# Altium PCB CAN Logger 3b HP3561 PCB - autoroute2.PcbDoc (part 3 of 3)
Units mil, origin at the board's own origin, x right, y up, seen from the top; angles counter-clockwise.
Board outline 2229 x 3254 mil, 4 copper layers (Component Side, Signal Layer 2, Signal Layer 1, Solder Side), stack 33.234 mil thick; 116 components, 130 nets, 579 pads, 364 vias.
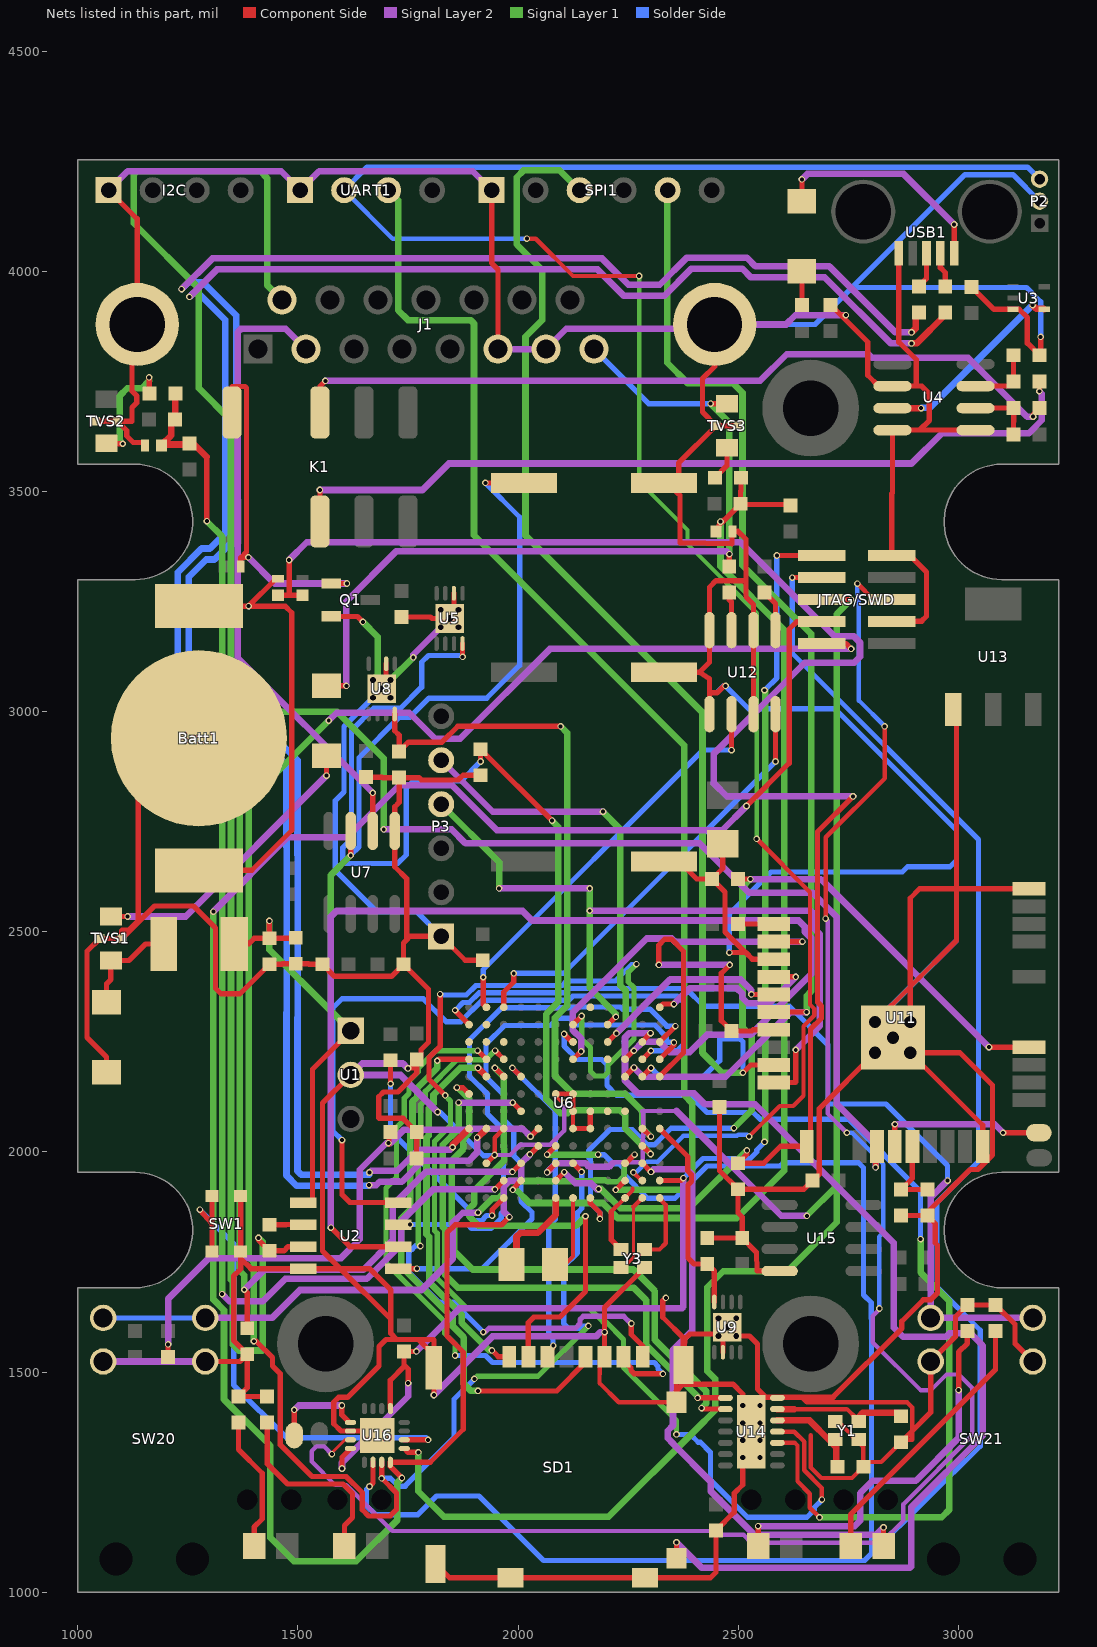
[diagram p4: the nets of this part, all layers, seen from the top]

## Via types
v1: diameter 15, hole 9, Component Side to Solder Side, 282 vias
v2: diameter 20, hole 10, Component Side to Solder Side, 66 vias
v3: diameter 20, hole 13, Component Side to Solder Side, 12 vias
v4: diameter 50, hole 28, Component Side to Solder Side, 4 vias

## Nets (pads, with @x,y where several pads share a name; then routed paths per layer and width w, separated by ;. In a path a pad name is that pad's centre, name@x,y a point inside that pad or via, vN(x,y) a via of type N, cw(c..) or ccw(c..) an arc to the next point about the centre after c; other vN are vias at no path point) (continued)
D20: U6.A3 U12.8 | length 988.2
  Component Side w12: U6.A3@1967.52,2328.7 1967.52,2363.52 1990.28,2386.28 v1(1990.28,2406) ; v1(2585,2887) U12.8@2585,2994.53
  Solder Side w12: v1(1990.28,2406) 2104,2406 v1(2585,2887)
D21: U6.A2 U12.6 | length 940.5
  Component Side w12: v1(1921,2396.96) 1921,2335.85 U6.A2@1928.15,2328.7 ; v1(2485,2913) U12.6@2485,2994.53
  Solder Side w12: v1(1921,2396.96) 1921,2414 2420,2913 v1(2485,2913)
D23: U6.A12 U11.13 | length 421.5
  Component Side w12: U6.A12@2321.85,2328.7 2329.15,2336 v1(2354,2336) ; U11.13@2581.04,2397.79 v1(2631,2397.79)
  Signal Layer 2 w15: v1(2354,2336) 2389.75,2371.75 2497.81,2371.75 2509.53,2360.04 2509.53,2350.19 2521.72,2338 2571.21,2338 v1(2631,2397.79)
D24: R17.1 U6.K4 U11.22 | length 4489.8
  Component Side w12: v1(1378,1687) 1385,1680 R17.1@1385,1599.53 ; v1(1987,1955) 1987.52,1955 U6.K4@2006.89,1974.37 ; v1(2812.57,1965) 2812.57,2009.64 U11.22@2815.84,2012.91
  Signal Layer 2 w15: v1(1378,1687) 1423,1732 1648.28,1732 1715,1798.72 1715,1878.72 1791.28,1955 v1(1987,1955) ; v1(1695,2733) 1849,2733 1881,2701 2413,2701 2525,2589 2669,2589 2724,2534 2724,2109.1 2812.57,2020.53 v1(2812.57,1965)
  Signal Layer 1 w15: v1(1378,1687) 1378,1720 1368,1730 1368,2981.5 1386.5,3000 1589,3000 1695,2894 v1(1695,2733)
D25: R27.1 U6.M8 U11.4 | length 2020.4
  Component Side w12: U6.M8@2164.37,1895.63 2164.37,1883.6 2186,1861.97 v1(2186,1848) ; R27.1@2499.53,2620 v1(2527.77,2620) ; v1(3070,2238.03) U11.4@3160.96,2238.03
  Signal Layer 2 w15: v1(2527.77,2620) 2688.03,2620 v1(3070,2238.03)
  Signal Layer 1 w15: v1(2490.25,2054) 2531,2094.75 2531,2262 2510,2283 2510,2602.23 v1(2527.77,2620)
  Solder Side w12: v1(2186,1848) 2186,1862 2164.5,1883.5 2164.5,1983.34 2160.5,1987.34 2160.5,2002.66 2208.94,2051.1 2259.27,2051.1 2294.2,2016.17 2309.52,2016.17 2347.35,2054 v1(2490.25,2054)
D26: U6.L10 UART1.3 | length 2833.1
  Component Side w12: v1(2222,1913.89) U6.L10@2243.11,1935
  Signal Layer 1 w15: UART1.3@1705,4185 1728,4162 1728,3912 1750,3890 1892,3890 1900,3882 1900,3401.1 2377.53,2923.57 2377.53,2129.47 2395.6,2111.4 2395.6,1932.09 2377.4,1913.89 v1(2222,1913.89)
D27: P2.3 U6.L11 UART1.2 | length 4891.5
  Component Side w10: v1(2020,4075) 2040,4075 2125,3990 v1(2275,3990) ; v1(2262,1953.68) 2262,1953.39 2280.39,1935 U6.L11@2282.48,1935 ; v1(2525,2035) 2594.53,2104.53 2625.14,2104.53 2648.5,2127.89 2648.5,2285.59 2673.34,2310.43 2673.34,2324.93 2663.32,2334.95 2663.32,2590.26 v1(2542.08,2711.5)
  Signal Layer 1 w10: v1(2275,3990) 2275,3523 2385,3413 2385,3381.25 2542.08,3224.17 v1(2542.08,2711.5)
  Solder Side w10: UART1.2@1605,4185 1715,4075 v1(2020,4075) ; v1(2262,1953.68) 2268.68,1953.68 2292.99,1977.99 2316.85,1977.99 2375.37,2036.5 2497.5,2036.5 2500,2039 2521,2039 v1(2525,2035)
  Solder Side w12: UART1.2@1605,4185 1657.32,4237.32 3157.68,4237.32 P2.3@3185,4210
D28: SW20.1 SW20.3 U6.K10 | length 1461.3
  Component Side w12: U6.K10@2242.3,1971.41 U6.K10@2243.11,1972.22 ; U6.K10@2243.11,1974.37 U6.K10@2243.11,1972.22 ; v1(2265,1994.11) U6.K10@2243.11,1972.22
  Signal Layer 2 w15: SW20.3@1289.5,1623 1441,1623 1504.5,1686.5 1780.5,1686.5 1852,1758 1852,1839.68 1874.32,1862 v1(1909,1862)
  Signal Layer 1 w12: 2203.74,1932.39 2227.55,1932.39 2241.5,1946.34 2241.5,1970.61 v1(2265,1994.11)
  Signal Layer 1 w15: v1(1909,1862) 1942,1895 1955.8,1895 1967.52,1906.72 1967.52,1921.8 1979.72,1934 2057.35,1934 2057.72,1933.63 2172.46,1933.63 2174.72,1935.89 2196.96,1935.89
  Solder Side w12: SW20.1@1057.5,1623 SW20.3@1289.5,1623
D29: U2.1 U6.D12 | length 1322.7
  Component Side w12: U2.1@1727.87,1735 v1(1770,1735) ; U6.D12@2321.85,2210.59 2354,2242.74 v1(2354,2249)
  Solder Side w12: v1(1770,1735) 1918.81,1735 2031.65,1847.84 2031.65,1863.16 2007,1887.81 2007,1975 1990,1992 1990,2050.8 1969.5,2071.3 1969.5,2128.5 1927.5,2170.5 1927.5,2245.23 1969.77,2287.5 2073.3,2287.5 2089.3,2303.5 2119.43,2303.5 2134.43,2288.5 2310.5,2288.5 2337.5,2261.5 2337.5,2250 2338.5,2249 v1(2354,2249)
D30: U2.4 U6.D11 | length 1628.5
  Component Side w12: v1(1600,2027) 1600,1903 1618,1885 U2.4@1727.87,1885 ; U6.D11@2282.48,2210.59 v1(2301.89,2230)
  Solder Side w12: v1(1600,2027) 1579,2048 1579,2327 1600,2348 1784.5,2348 1836.5,2296 1869.84,2296 1918.29,2344.46 2114.58,2344.46 2124.62,2354.5 2361.66,2354.5 2376.03,2340.13 2376.03,2244.87 2361.16,2230 v1(2301.89,2230)
D31: R33.1 U6.E12 U11.16 | length 850.9
  Component Side w12: v1(2320,2425) 2320,2470.16 2333.34,2483.5 2348.66,2483.5 2376.03,2456.13 2376.03,2225.4 U6.E12@2321.85,2171.22 ; v1(2481,2425) 2462,2406 2462,2298.15 R33.1@2485.15,2275 2531,2275 2533.79,2277.79 U11.16@2581.04,2277.79
  Signal Layer 2 w15: v1(2320,2425) v1(2481,2425)
D32: SPI1.3 U6.E11 U11.18 | length 2934.8
  Component Side w12: U6.E11@2282.48,2171.22 v1(2302.13,2190.87) ; v1(2511,2180) 2528.79,2197.79 U11.18@2581.04,2197.79
  Signal Layer 1 w15: SPI1.3@2140,4185 2095,4230 2012.5,4230 1997,4214.5 1997,4062 2055,4004 2055,3890 2017,3852 2017,3400.78 2419,2998.78 2419,2225 2464,2180 v1(2511,2180)
  Solder Side w12: v1(2302.13,2190.87) 2323,2170 2420.5,2170 2458,2207.5 2458,2256 2459,2257 2504.5,2257 2511,2250.5 v1(2511,2180)
D35: U6.A8
D36: U6.D7 U11.11 | length 780.9
  Component Side w12: U6.D7@2125,2210.59 2125.59,2210.59 v1(2143.49,2228.49) ; U11.11@2581.04,2477.79 2645.76,2477.79 v1(2645.82,2477.85)
  Signal Layer 2 w15: v1(2143.49,2228.49) 2143.49,2257.52 2124.69,2276.32 2124.69,2317.3 2292.39,2485 2349.28,2485 2356.43,2477.85 v1(2645.82,2477.85)
D37: U6.C7 U14.3 | length 2314.8
  Component Side w10: U14.3@2589.37,1339.1 2629.14,1339.1 2635,1333.24 2635,1251.67 2663,1223.67 2663,1192 v1(2685,1170)
  Component Side w12: v1@2104.77,2268 U6.C7@2123.91,2248.87 ; U6.C7@2123.91,2249.41 U6.C7@2123.91,2248.87 ; U6.C7@2125,2249.96 U6.C7@2123.91,2248.87
  Signal Layer 1 w15: v1(2685,1170) 2962.5,1170 2980,1187.5 2980,1661 2914.5,1726.5 v1(2914.5,1802)
  Solder Side w12: v1(2104.72,2268) 2104.72,2241.1 2135.83,2209.99 2190.17,2209.99 2202,2198.16 2202,2151 2224,2129 2390,2129 2429.5,2089.5 2534.5,2089.5 2549.5,2074.5 2750.45,2074.5 2914.5,1910.45 v1(2914.5,1802)
D38: U6.B7 U14.4 | length 3092.8
  Component Side w10: U14.4@2589.37,1364.69 2627.35,1364.69 2650,1342.04 2650,1276.91 2690.29,1236.62 v1(2690.29,1210)
  Component Side w12: v1(1823,2358.5) 1823,2239.95 1798,2214.95 1798,2165.19 v1(1834.69,2128.5) ; U6.B7@2125,2289.33 v1(2144.69,2309.02)
  Signal Layer 1 w12: v1(1834.69,2128.5) 1834.69,2127.69 1846.5,2115.87 1846.5,2060.22 1810.5,2024.22 1810.5,1821.2 1816.5,1815.2 1816.5,1712.27 1882.93,1645.84 2161.33,1645.84 2193.8,1613.36 2200.35,1613.36 2239.78,1573.94 2239.78,1510.22 2360,1390 v1(2360,1358.29) ; v1(2144.69,2309.02) 2144.69,2257.08 2164.5,2237.26 2164.5,2183.34 2175.34,2172.5 2195.97,2172.5 2204.5,2181.03 2204.5,2197.66 2263.5,2256.66 2263.5,2373.38 2250.54,2386.34 2250.54,2408.11 v1(2269.04,2426.61)
  Solder Side w12: v1(1823,2358.5) 1825,2356.5 1882.25,2356.5 1904.21,2378.46 2100.5,2378.46 2110.54,2388.5 2220.79,2388.5 2258.33,2426.04 2268.47,2426.04 v1(2269.04,2426.61) ; v1(2360,1358.29) 2391.71,1358.29 2409.5,1340.5 2414.67,1340.5 2437.5,1317.67 2437.5,1254.42 2521.92,1170 2656,1170 2672.75,1186.75 2672.75,1191.64 2690.29,1209.19 v1(2690.29,1210)
D39: D6.1 U6.K11 | length 1393.9
  Component Side w12: U6.K11@2282.48,1974.37 v1(2302,1954.85) ; D6.1@2830.4,1105 v1(2830.4,1147)
  Signal Layer 2 w15: v1(2302,1954.85) 2307.52,1960.37 2383.88,1960.37 2395.6,1948.65 2395.6,1593.78 2352,1550.18 2352,1378.57 2340,1366.57 2340,1350 2352,1338 2352,1337 2437.5,1251.5 2437.5,1229.81 2537.31,1130 2813.4,1130 v1(2830.4,1147)
D40: R13.1 U6.H12 U9.8 | length 469.6
  Component Side w12: U6.H12@2321.85,2053.11 2385.5,1989.46 2385.5,1956.63 2394.1,1948.03 2394.1,1932.71 2386,1924.61 2386,1759.47 2400,1745.47 R13.1@2430,1745.47 2445.94,1729.53 U9.8@2445.94,1659.17
D41: R12.1 U6.H11 U8.8 | length 1619.7
  Component Side w12: U8.8@1720,2995 1720,2957 1730,2947 R12.1@1730,2909.53 1751.47,2931 1827,2931 1863,2967 v1(2097,2967) ; U6.H11@2282.48,2053.11 U6.H11@2282.95,2053.58 ; U6.H11@2284.65,2055.28 U6.H11@2282.95,2053.58 ; v1(2301.86,2034.67) U6.H11@2282.95,2053.58
  Signal Layer 1 w15: v1(2097,2967) 2111.5,2952.5 2111.5,2332.4 2084,2304.9 2084,2172.88 2124.88,2132 2243.47,2132 2282.22,2093.25 2282.22,2054.31 v1(2301.86,2034.67)
D42: R11.1 U5.8 U6.J11 | length 2440.8
  Component Side w12: v1(1874,3125) 1874.06,3125.06 U5.8@1874.06,3155 ; v1(1915,2887) R11.1@1915,2915 v1(2077.33,2752.67) ; U6.J11@2282.48,2013.74 2283.19,2013.74 v1(2301.44,1995.49)
  Signal Layer 1 w15: v1(2077.33,2752.67) 2091.5,2738.5 2091.5,2340.68 2064,2313.18 2064,2120.26 2095.84,2088.42 2112.41,2088.42 2118.99,2095 2231.71,2095 2243.43,2083.28 2243.43,2053.5 v1(2301.44,1995.49)
  Solder Side w12: v1(1874,3125) 1871,3128 1796.5,3128 1781,3112.5 1781,3056 1733,3008 1672,3008 1621.75,2957.75 1621.75,2711.25 1601.5,2691 1601.5,2657 1603,2655.5 1726.5,2655.5 1746,2675 1746,2826.5 1762.5,2843 1871,2843 v1(1915,2887)
D43: U2.2 U6.D10 | length 2610
  Component Side w12: v1(1575,1828) 1618,1785 U2.2@1727.87,1785 ; U6.D10@2243.11,2210.59 2262.52,2230 v1(2263,2230)
  Signal Layer 2 w15: v1(1575,1828) 1575,2535 1587.5,2547.5 2010.5,2547.5 2032,2526 2637.5,2526 2651,2512.5 2651,2500.96 2665.82,2486.14 2665.82,2403.82 2528,2266 2429,2266 2390,2227 2344.65,2227 2321.65,2250 2283,2250 v1(2263,2230)
D44: U2.3 U6.C12 | length 1253.7
  Component Side w12: U2.3@1727.87,1835 v1(1755,1835) ; U6.C12@2321.85,2249.96 2357.53,2285.64 v1(2357.53,2285.87)
  Solder Side w12: v1(1755,1835) 1885.8,1835 1894.3,1826.5 1938.55,1826.5 1961.63,1849.57 1961.63,1859.82 1967.16,1865.35 1967.16,2049.59 1930.6,2086.16 1930.6,2131.37 1889.96,2172 1889.96,2255 1962.42,2327.46 2121.62,2327.46 2123.67,2329.5 2232.66,2329.5 2237.66,2324.5 2299.5,2324.5 2338.13,2285.87 v1(2357.53,2285.87)
D45: SD1.DT U6.C11 | length 2533.2
  Component Side w12: U6.C11@2282.48,2249.96 2282.48,2251.48 v1(2301,2270) ; SD1.DT@2359.65,1076.99 2360,1076.99 v1(2360,1113)
  Signal Layer 2 w15: v1(2301,2270) 2253,2270 2243,2260 2243,2162.5 2272.5,2133 2400,2133 2425,2108 2539,2108 2853.75,1793.25 2853.75,1601.25 2875,1580 2972,1580 2980,1588 3028,1588 3056,1560 3056,1355.5 2893,1192.5 2893,1058 2890,1055 2418,1055 v1(2360,1113)
D46: U6.D9
D47: P3.5 U6.C9 U11.14 | length 1405.7
  Component Side w12: U6.C9@2203.74,2249.96 v1(2223.43,2269.65) ; v1(2530,2358) 2580.83,2358 U11.14@2581.04,2357.79
  Signal Layer 2 w15: P3.5@1825.47,2890 1942.47,2773 v1(2193,2773) ; v1(2223.43,2269.65) 2345.53,2391.75 2506.09,2391.75 2530,2367.85 v1(2530,2358)
  Signal Layer 1 w15: v1(2193,2773) 2232.04,2733.96 2232.04,2378.67 2245,2365.71 2245,2291.22 v1(2223.43,2269.65)
D48: P3.4 U6.B9 U11.19 | length 1766.7
  Component Side w12: U6.B9@2203.74,2289.33 2221.41,2307 v1(2222.23,2307) ; U11.19@2581.04,2157.79 2630,2157.79 2631,2158.79 v1(2631,2232)
  Signal Layer 2 w15: v1(1957,2599) v1(2163,2599) ; v1(2163,2548) 2665,2548 2671,2542 2671,2509.24 2685.82,2494.42 2685.82,2286.82 v1(2631,2232)
  Signal Layer 1 w15: P3.4@1825.47,2790 1957,2658.47 v1(1957,2599) ; v1(2163,2599) v1(2163,2548) 2163,2373 2222.23,2313.77 v1(2222.23,2307)
D49: U6.G10
D50: U6.G9
D51: U6.C2
D52: U6.C3
D53: SW21.1 SW21.3 U6.B1 | length 2024.1
  Component Side w12: v1(1857,2322) 1857,2321.11 U6.B1@1888.78,2289.33
  Signal Layer 2 w15: v1(2975.84,1935) 2937.5,1896.66 SW21.1@2937.5,1623 SW21.3@3169.5,1623
  Solder Side w12: v1(1857,2322) 1857.81,2322 1875.31,2339.5 1889.3,2339.5 1911.25,2361.46 2107.54,2361.46 2117.58,2371.5 2381.5,2371.5 2422,2331 2616.36,2331 2704,2243.36 2704,2110 2705,2109 2836.16,2109 2975.84,1969.32 v1(2975.84,1935)
D54: U6.C1
D55: U6.B2
D56: U6.F1 U14.9 | length 1304.5
  Component Side w12: v1(1861,2146) 1874.63,2146 U6.F1@1888.78,2131.85 ; v1(2417,1418) 2419.13,1415.87 U14.9@2471.26,1415.87
  Signal Layer 1 w15: v1(1861,2146) 1863.28,2146 1889,2120.28 1889,2043.37 1876,2030.37 1876,2006.99 1849,1979.99 1849,1837.15 1855,1831.15 1855,1775 1897,1733 2262,1733 2311,1684 2311,1573 2428,1456 2428,1429 v1(2417,1418)
D57: U6.G4 U14.8 | length 1371.3
  Component Side w12: v1(1988,2112) U6.G4@2006.14,2093.86 ; v1(2408,1441.46) U14.8@2471.26,1441.46
  Signal Layer 2 w15: v1(1865,2112) v1(1988,2112)
  Signal Layer 1 w15: v1(1865,2112) 1865,2052.56 1829,2016.56 1829,1828.86 1835,1822.86 1835,1719.93 1862.93,1692 2262.5,1692 2291,1663.5 2291,1562.01 2408,1445.01 v1(2408,1441.46)
DAC0: C17.2 D9.2 R15.2 R24.1 U6.L3 | length 2964.6
  Component Side w12: R24.1@1220.45,3655 R24.1@1220.45,3663.93 ; v1(1293,3433) 1293,3579 ; v1(1947.52,1915) U6.L3@1967.52,1935
  Component Side w15: R24.1@1220.38,3664 1212.13,3655.75 1212.13,3628.07 1190.04,3605.98 D9.2@1190.04,3605 1192.31,3607.26 1251.24,3607.26 C17.2@1253.5,3609.53 1255.03,3608 1264,3608 1293,3579 ; R24.1@1220.45,3663.93 1220.95,3664.43 1220.95,3722.43 R15.2@1221.53,3723
  Signal Layer 2 w15: v1(1328,1677) 1344,1661 1420.5,1661 1471.5,1712 1656.57,1712 1735,1790.43 1735,1843.28 1806.72,1915 v1(1947.52,1915)
  Signal Layer 1 w15: v1(1293,3433) 1328,3398 v1(1328,1677)
DAC1: C24.2 D10.2 R25.2 R28.1 U6.L4 | length 2526.7
  Component Side w12: v1@1990.28,1918.39 U6.L4@2006.89,1935 ; D10.2@2449.53,3410 2456.92,3424 2476.92,3444 ; v1(2460,3432) 2464.92,3432 2476.92,3444 ; R25.2@2506.6,3531.85 2506.6,3502.15 2505.45,3501 R28.1@2505.45,3472.53 ; C24.2@2618.79,3469.05 2617.06,3470.79 2507.19,3470.79 R28.1@2505.45,3472.53 ; 2476.92,3444 R28.1@2505.45,3472.53
  Signal Layer 1 w15: v1(1988,1914) 1996,1914 2026,1884 2192.28,1884 2226.28,1850 2497,1850 2605,1958 2605,3186 2460,3331 v1(2460,3432)
EOSC16: U6.M11 Y3.1 | length 172.3
  Component Side w7: Y3.1@2242.3,1740 2261.93,1759.62 2261.93,1875.08 2262,1875.15
  Component Side w10: 2262,1875.15 U6.M11@2282.48,1895.63
EXTAL32: U6.M6 X1.2 | length 216.4
  Component Side w15: X1.2@1985.57,1744 1996.56,1754.98 1996.56,1807.9 2005.34,1816.68 2045.21,1816.68 2085.63,1857.1 U6.M6@2085.63,1895.63
GND: Batt1.2 C1.1 C2.2 C3.2 C4.2 C5.1 C6.1 C7.1 C8.1 C9.1 C10.2 C11.1 C12.1 C13.1 C14.1 C15.1 C16.1 C18.1 C19.1 C20.1 C22.1 C28.2 D9.1 D10.1 I2C.1 J1.6 J1.7 J1.16 J1.17 JTAG/SWD.3 JTAG/SWD.9 L5.1 P2.2 P3.1 Q1.2 R2.2 R3.2 R7.2 R8.2 R9.2 R11.2 R12.2 R13.2 R14.1 R17.2 R19.2 R23.2 R27.2 SD1.6 SD1.P1 SD1.P2 SD1.P3 SD1.P4 SD1.P5 SD1.SW SPI1.1 SW1.3 SW1.4 SW20.2 SW20.4 SW21.2 SW21.4 TVS1.3 TVS2.3 TVS3.3 U1.2 U2.8 U3.3 U4.2 U4.4 U4.5 U5.0 U5.2 U6.F6 U6.F7 U6.G7 U6.G8 U6.H3 U6.H7 U6.H8 U6.K2 U6.M10 U7.5 U8.0 U8.2 U9.0 U9.2 U11.9 U11.12 U11.28 U11.29 U12.2 U12.4 U12.5 U12.7 U13.1 U14. U14.7 U15.4 U16.2 U16.17 UART1.1 USB1.4 Y1.2 Y1.4 Y3.2 Y3.4 Z1.1 | length 27834.5
  Component Side w8: U6.F6@2085.63,2131.85 2080.69,2131.85 2100.54,2112 v1(2105.29,2112)
  Component Side w10: v1(1947.01,1993.23) 1947.01,2032.6 U6.H3@1967.52,2053.11 ; U6.H7@2125,2053.11 U6.G7@2125,2092.48 ; SD1.6@2196.66,1534.87 2185.91,1524.12 2185.91,1495.46 2185,1494.54 2185,1475 2228.68,1431.32 SD1.SW@2359.65,1431.32 2359.65,1457.11 2359.65,1500.02 SD1.P2@2375.6,1515.97 ; 2210.5,1863.02 2211.5,1864.02 U6.M10@2243.11,1895.63 2260.12,1912.64 2260.12,1916.99 ; U14.7@2589.37,1441.46 2645.71,1441.46 2655.84,1431.32 2883.84,1431.32 2895.75,1419.42 2895.75,1366.22 2895.75,1346.33 2875.86,1346.33 C14.1@2870,1340.47 2825.27,1295.75 2795.28,1295.75 C15.1@2784.53,1285 ; 2665,1356.02 2665,1283.13 2688.87,1259.25 2758.78,1259.25 C15.1@2784.53,1285 ; Y1.2@2734,1380.85 2784.53,1330.32 C15.1@2784.53,1285
  Component Side w12: TVS2.3@1040,3660 TVS2.3@1090,3660 ; Z1.1@1065,2181 1065,2216 1021,2260 1021,2456 TVS1.3@1050,2485 TVS1.3@1100,2485 ; I2C.1@1070,4185 1135,4120 J1.16@1135,3880 1123,3868 1123,3728.5 1123.16,3728.5 1134,3717.66 1134,3702.34 1123.16,3691.5 1123,3691.5 1123,3660 TVS2.3@1090,3660 ; D9.1@1152.64,3605 1152.64,3609.2 1149.78,3612.05 1125.78,3612.05 1110.97,3626.87 1110.97,3639.03 TVS2.3@1090,3660 ; Batt1.2@1275,2940 1137,2802 1137,2525 1116,2504 1101,2504 1100,2503 TVS1.3@1100,2485 ; SW20.4@1289.5,1524 1368.53,1524 R17.2@1385,1540.47 ; SW1.4@1369.96,1900 SW1.3@1369.96,1774.02 1369.96,1757.99 ; R3.2@1430,1444.53 R2.2@1365,1444.53 1385,1464.53 R17.2@1385,1540.47 ; Q1.2@1575.71,3216.69 1635,3216.69 v1(1647.5,3204.19) ; U1.2@1620,2175 1556,2111 1556,1775 1596,1735 ; C16.1@1655,2851.62 1691,2851.62 1692.15,2850.47 R12.2@1730,2850.47 ; U16.17@1680.47,1356.02 1654.84,1356.02 1645,1365.87 U16.2@1619.45,1365.87 1598,1365.87 1581.34,1382.53 1581.34,1431.66 1592.17,1442.5 1612.62,1442.5 1684,1513.88 1684,1558 1700,1574 1724.5,1574 ; U8.2@1700.31,3109.17 1700.31,3082.24 v3(1710.47,3072.09) ; R14.1@1735,3215.47 1801.14,3215.47 1804.52,3212.09 U5.0@1844.53,3212.09 ; v1(1750,2190) 1750.57,2190.57 1766.07,2190.57 1770,2194.5 ; C4.2@1769.53,1985 1769.53,2015 1770,2015.47 C20.1@1770,2045.47 1739,2076.47 1685,2076.47 1683.53,2077.95 1683.53,2125.53 1694.5,2136.5 1727,2136.5 1770,2179.5 1770,2194.5 ; SD1.P3@1813,1064 1844.3,1032.7 SD1.P4@1982.49,1032.7 SD1.P5@2288.79,1032.7 2437.5,1032.7 2450,1045.2 C8.1@2450,1140.47 2491,1181.47 2491,1224.37 2510.63,1244 U14.@2510.63,1305.63 ; U5.2@1854.37,3269.17 1854.37,3242.24 v3(1864.53,3232.09) ; R11.2@1915,2855.95 1874.95,2855.95 1864,2845 1780.47,2845 1775,2850.47 R12.2@1730,2850.47 ; C13.1@1920,2435.47 1880,2435.47 P3.1@1825.47,2490 1755,2490 1747,2482 ; U6.K2@1928.15,1974.37 v1(1947.01,1993.23) ; SPI1.1@1940,4185 1940,4019.49 1954.49,4005 J1.6@1954.49,3824.09 ; U6.F6@2085.63,2131.85 U6.F7@2125,2131.85 U6.G7@2125,2092.48 ; U6.H7@2125,2053.11 U6.H8@2164.37,2053.11 U6.G8@2164.37,2092.48 ; SD1.6@2196.66,1534.87 v1(2196.66,1590.89) 2196.66,1646.5 Y3.2@2287.16,1737 ; 2211.5,1864.02 2211.5,1800.85 Y3.4@2234.01,1778.34 ; C28.2@2332.05,2660 2366,2660 2406,2620 R27.2@2440.47,2620 ; C2.2@2332.05,3090 2412.5,3090 ; C3.2@2332.05,3520 C3.2@2340,3520 ; v1(2335.67,1668.6) 2328.85,1661.78 2328.85,1624.66 2378.55,1574.96 ; 2359.65,1457.11 2375,1472.46 2488.17,1472.46 2510.63,1450 U14.@2510.63,1423.74 ; 2368,3489.07 2368,3383.94 2485.93,3382 D10.1@2486.93,3410 2500,3410 2518,3392 2518,3298 ; 2368,3492 2365,3495 ; C3.2@2396,3520 C3.2@2365,3520 ; R13.2@2430,1804.53 2465.62,1804.53 C9.1@2509.37,1804.53 ; U12.5@2435,2994.53 2435,3042 ; J1.17@2446.81,3880 2446.81,3784.81 2419,3757 2419,3681 TVS3.3@2450,3650 ; 2452,3044 2435,3043 ; C7.1@2457.6,2102.32 2457.6,1957.4 C22.1@2499.52,1915.47 ; C12.1@2465,2700 2465,2644.53 R27.2@2440.47,2620 ; U9.2@2465.63,1545 2465.63,1571.93 v3(2455.47,1582.09) 2450.88,1586.68 2390.28,1586.68 2378.55,1574.96 ; v1(2471.56,3059) 2468.11,3059 2452.06,3042.95 2435,3042 ; v1(2480,2453) 2516.79,2453 ; v3(2495.47,1582.09) 2525.91,1582.09 2544,1564 2544,1461.5 2562.5,1443 2716,1443 2872,1599 2872,1615.48 2920.52,1664 2937.5,1664 2953,1679.5 2953,1788 2948,1793 2948,1837.47 C11.1@2930,1855.47 ; TVS3.3@2500,3650 TVS3.3@2450,3650 ; U14.@2510.63,1384.37 2510,1384.37 2529.68,1364.69 U14.@2530.31,1364.69 ; U12.7@2535,2994.53 U12.2@2535,3185.47 2535,3244 2518,3261 2518,3298 ; U15.4@2594.45,1729.53 2543,1729.53 2542,1771.89 C9.1@2509.37,1804.53 ; C6.1@2710,3924.53 2733.53,3901 ; v1(2745,3901) 2733.53,3901 ; v4(2811,2295.47) 2891,2375.47 ; JTAG/SWD.3@2849.06,3205 2850.06,3206 2917,3206 2927.99,3216.99 2927.99,3317.6 2890.59,3355 JTAG/SWD.9@2849.06,3355 2849.06,3496 2850.51,3497.46 U4.4@2850.51,3640 2912.5,3640 ; USB1.4@2865,4042 2865,3839.84 2905,3799.84 2905,3741 2904,3740 ; C5.1@2870,1855.47 C11.1@2930,1855.47 ; C14.1@2875.86,1346.33 2895.75,1366.22 2937.5,1407.97 SW21.2@2937.5,1524 2994,1580.5 2994,1625.69 R19.2@3020.84,1652.53 R23.2@3085,1652.53 3129,1608.53 3129,1564.5 SW21.4@3169.5,1524 ; v4(2891,2295.47) 2891,2375.47 ; U13.1@2988.9,3005 2988.9,2986 2996,2986 2996,2598.03 ; C19.1@3030.55,3965.43 3081.57,3914.41 U3.3@3124.57,3914.41 3138.59,3914.41 3157.03,3895.97 3157.03,3837.5 R7.2@3184.53,3810 3187.5,3812.97 v1(3187.5,3851.94) ; U4.5@3039.49,3640 2912.5,3640 ; U11.28@3055.84,2012.91 3055.84,2060.63 v4(2891,2225.47) ; U11.9@3160.96,2598.03 2996,2598.03 ; TVS1.3@1100,2485 1174,2559 1262.5,2559 1312.5,2509 1312.5,2372.1 1325,2359.6 1368.2,2359.6 C10.2@1435,2426.4 1464,2426.4 1465.15,2427.55 C1.1@1495,2427.55 1524,2427.55 1524.94,2426.61 R9.2@1555.47,2426.61 1583.08,2399 1712.61,2399 R8.2@1740,2426.39 ; 1369.96,1757.99 1369.96,1733.96 1354,1718 1354,1571.47 R17.2@1385,1540.47 ; 1369.96,1757.99 1392.95,1735 U2.8@1512.13,1735 1596,1735 ; 1596,1735 1711,1620 ; 1596,1735 1662.5,1735 1711,1686.5 1711,1620 ; 1711,1620 1711,1587.5 1724.5,1574 ; 1724.5,1574 1773.5,1574 ; R12.2@1730,2850.47 1730,2794 1720,2784 U7.5@1720,2729.49 1720,2648 1747,2621 1747,2482 ; R8.2@1740,2426.39 1796.75,2369.64 1796.75,2249.22 1779.75,2232.22 1779.75,2220.22 L5.1@1770,2210.47 1770,2194.5 ; R8.2@1740,2426.39 1740,2475 1747,2482 ; 1773.5,1574 1808.06,1574 1809.06,1573 SD1.P1@1809.06,1510.06 1809.06,1448.06 v1(1809,1448) 1809,1538.5 1773.5,1574 ; C3.2@2340,3520 C3.2@2365,3520 ; C3.2@2340,3520 2365,3495 ; 2365,3495 C3.2@2365,3520 ; C3.2@2365,3520 2365,3565 TVS3.3@2450,3650 ; 2378.55,1574.96 2375.6,1572 SD1.P2@2375.6,1515.97 2378.55,1574.96 ; 2412.5,3090 2435,3075 2435,3043 ; 2412.5,3090 2435,3112.5 U12.4@2435,3185.47 2435,3283 2450,3298 2518,3298 ; 2435,3042 2435,3043 ; R27.2@2440.47,2620 2470,2590.47 2470,2499.79 2516.79,2453 ; C22.1@2499.52,1915.47 2499.52,1862 2509.37,1852.16 C9.1@2509.37,1804.53 ; C22.1@2499.52,1915.47 2649.67,1915.47 C18.1@2669.19,1935 2684.5,1950.31 2684.5,2098.97 v4(2811,2225.47) v4(2891,2225.47) ; 2516.79,2453 2532,2437.79 U11.12@2581.04,2437.79 2532,2438.79 2517.79,2453 2516.79,2453 ; 2733.53,3901 2794.5,3840.03 2794.5,3764.52 2819.02,3740 U4.2@2850.51,3740 2904,3740 ; v4(2891,2225.47) 3004.03,2225.47 3078,2151.5 3078,1993 3045,1960 3027,1960 2930,1863 C11.1@2930,1855.47 ; 2891,2375.47 2891,2576.53 2912.5,2598.03 2996,2598.03 ; 2891,2375.47 2996,2480.47 2996,2598.03 ; 2904,3740 2917,3740 2934.5,3722.5 2934.5,3662 2912.5,3640
  Signal Layer 2 w10: v1(1947.01,1993.23) 1981.73,1993.23 2005,2016.5 2073.25,2016.5 2105.29,2048.55 v1(2105.29,2112)
  Signal Layer 2 w15: SW20.2@1057.5,1524 SW20.4@1289.5,1524 ; I2C.1@1070,4185 1113,4228 1462,4228 UART1.1@1505,4185 1548,4228 1897,4228 SPI1.1@1940,4185 ; v3(1670.47,3032.09) v3(1710.47,3032.09) ; v3(1670.47,3072.09) U8.0@1690.47,3072.09 ; U8.0@1690.47,3052.09 U8.0@1690.47,3072.09 ; v3(1710.47,3072.09) U8.0@1690.47,3072.09 ; v1(1750,2190) 1749.5,2190 1738.5,2201 1646,2201 U1.2@1620,2175 1733.24,2175 v1(1817.31,2090.93) ; v1(1762,3123.61) 1762,3129.56 v3(1824.53,3192.09) v3(1864.53,3192.09) ; v1(1809,1448) 1942,1581 2177.11,1581 2187,1590.89 v1(2196.66,1590.89) ; v3(1824.53,3232.09) 1825.44,3233 1863.61,3233 v3(1864.53,3232.09) 1864.53,3222 1854.44,3222 U5.0@1844.53,3212.09 ; J1.6@1954.49,3824.09 J1.7@2063.54,3824.09 2109.59,3870.14 2436.95,3870.14 J1.17@2446.81,3880 2608.98,3880 2629.98,3901 v1(2745,3901) ; v3(2455.47,1582.09) v3(2495.47,1582.09) ; v3(2455.47,1622.09) U9.0@2475.47,1622.09 ; U9.0@2475.47,1602.09 U9.0@2475.47,1622.09 ; v3(2495.47,1622.09) U9.0@2475.47,1622.09
  Signal Layer 1 w15: v1(1647.5,3204.19) 1681,3170.69 1681,3082.61 v3(1670.47,3072.09) ; v3(1710.47,3032.09) v3(1710.47,3072.09) v1(1762,3123.61) ; v3(1864.53,3192.09) v3(1864.53,3232.09) ; v3(2495.47,1582.09) v3(2495.47,1622.09)
  Solder Side w12: v3(1670.47,3032.09) 1604.75,2966.36 1604.75,2817.99 1584.5,2797.74 1584.5,2640.5 1680,2545 1770.47,2545 P3.1@1825.47,2490 ; v1(1817.31,2090.93) 1822.43,2090.93 1921.92,1991.45 v1@1945.23,1991.45 ; J1.17@2446.81,3880 2675,3880 2759,3964 ; 2452,3044 2467,3059 v1(2471.56,3059) 2523.56,3007 2720,3007 2996,2731 2996,2662.5 ; v1(2480,2453) 2480,2541 2575,2636 2873,2636 2885,2648 2981.5,2648 2996,2662.5 ; v4(2811,2295.47) 2996,2480.47 2996,2662.5 ; P2.2@3185,4160 3124.68,4220.32 3015.32,4220.32 2759,3964 ; v1(3187.5,3851.94) 3187.5,3931.66 3155.16,3964 2759,3964
J1708+: K1.2 R5.2 | length 1794.3
  Component Side w12: K1.2@1550,3680 1550,3739.5 v1(1562.5,3752) ; v1(3170,3670.5) 3170,3675 R5.2@3185,3690
  Signal Layer 2 w15: v1(1562.5,3752) 2550,3752 2610.5,3812.5 2796.31,3812.5 2804.72,3804.09 3022.91,3804.09 3156.5,3670.5 v1(3170,3670.5)
J1708-: K1.5 R6.2 | length 1867.3
  Component Side w12: K1.5@1550,3432.36 v1(1550,3504) ; v1(3184.46,3728.25) v1(3184.46,3728.25) R6.2@3184.53,3750
  Signal Layer 2 w15: v1(1550,3504) 1783,3504 1843,3564 2894,3564 2962.5,3632.5 3160.28,3632.5 3190,3662.22 3190,3722.71 v1(3184.46,3728.25)
LIN: J1.2 U7.6 | length 1436.8
  Component Side w12: U7.6@1670,2729.49 v1(1670,2816)
  Signal Layer 2 w15: J1.2@1518.27,3824.09 1472.5,3869.86 1370.77,3869.86 1363.44,3862.54 1363.44,3122.56 v1(1670,2816)
MOSI1: SPI1.5 U6.E10 U11.15 | length 2632.9
  Component Side w12: U6.E10@2243.11,2171.22 2263.39,2191.5 v1(2263.5,2191.5) ; U11.15@2581.04,2317.79 2655.73,2317.79 v1(2655.84,2317.68)
  Signal Layer 2 w15: v1(2263.5,2191.5) 2284.13,2170.87 2471.87,2170.87 2618.68,2317.68 v1(2655.84,2317.68)
  Signal Layer 1 w15: SPI1.5@2340,4185 2339,4184 2339,3793 2385,3747 2488,3747 2510,3725 2510,3333 2665.82,3177.18 2665.82,2364.82 2655.84,2354.84 v1(2655.84,2317.68)
NetBatt1_1: Batt1.1 D7.1 | length 1052.9
  Component Side w12: Batt1.1@1275,2640 1395,2640 1486,2731 1486,3225 1471,3240 v1(1388,3240) ; Batt1.1@1275,3240 v1(1388,3240) ; D7.1@1455,3302.4 1450.27,3302.4 1387.98,3240.11 v1(1388,3240)
NetC5_2: C5.2 C11.2 U11.24 | length 169.1
  Component Side w12: U11.24@2895.84,2012.91 2895.84,1940.37 C5.2@2870,1914.53 C11.2@2930,1914.53
NetC14_2: C14.2 U14.6 Y1.1 | length 315.4
  Component Side w7: Y1.1@2775.12,1399.63 Y1.1@2769.25,1393.75 ; Y1.1@2769.25,1393.75 2765.77,1390.28 2772.72,1390.28 Y1.1@2769.25,1393.75
  Component Side w10: 2627.35,1415.87 2747.13,1415.87 Y1.1@2769.25,1393.75
  Component Side w15: U14.6@2589.37,1415.87 2627.35,1415.87 ; Y1.1@2775.12,1399.63 2782.76,1407.26 2862.26,1407.26 C14.2@2870,1399.53
NetC15_2: C15.2 U14.5 Y1.3 | length 204.3
  Component Side w15: U14.5@2589.37,1390.28 2662.24,1390.28 2708.39,1344.13 2713.52,1339 2722.54,1329.98 2722.54,1287.94 C15.2@2725.47,1285
NetC23_2: C23.2 U6.M3 | length 539.8
  Component Side w12: v1(1710.47,2155) C23.2@1710.47,2208.27 ; v1(1941.39,1855.5) 1941.39,1869.5 U6.M3@1967.52,1895.63
  Solder Side w12: v1(1710.47,2155) 1710.47,2047.37 1890.5,1867.34 1890.5,1854.34 1901.34,1843.5 1916.66,1843.5 1928.66,1855.5 v1(1941.39,1855.5)
NetD1_2: D1.2 R2.1 | length 310.5
  Component Side w12: R2.1@1365,1385.47 1365,1324 1419,1270 1419,1166 1400.6,1147.6 D1.2@1400.6,1105
NetD2_2: D2.2 R3.1 | length 442.3
  Component Side w12: R3.1@1430,1385.47 1430,1292 1476.5,1245.5 1602.58,1245.5 1624,1224.08 1624,1170 1605.6,1151.6 D2.2@1605.6,1105
NetD3_2: D3.2 TVS1.1 | length 667.5
  Component Side w12: TVS1.1@1075,2535 v1(1113,2535) ; v1(1565,2855) D3.2@1565,2900
  Signal Layer 2 w15: v1(1113,2535) 1245,2535 v1(1565,2855)
NetD4_2: D4.2 R19.1 | length 871.5
  Component Side w12: D4.2@2545.6,1105 v1(2545.6,1150) ; v1(3001,1459) 3001,1545.32 3020.84,1565.16 R19.1@3020.84,1593.47
  Signal Layer 2 w15: v1(2545.6,1150) 2765,1150 2777.5,1162.5 2777.5,1225 2805.5,1253 2904,1253 3001,1350 v1(3001,1459)
NetD5_1: D5.1 USB1.1 | length 513.3
  Component Side w12: D5.1@2645,4160 v1(2645,4209.5) ; USB1.1@2990.98,4042 v1(2990.98,4107)
  Signal Layer 2 w15: v1(2645,4209.5) 2657.5,4222 2875.98,4222 v1(2990.98,4107)
NetD5_2: D5.2 L6.1 | length 76.5
  Component Side w12: L6.1@2645,3924.53 D5.2@2645,4001
NetD6_2: D6.2 R23.1 | length 624.9
  Component Side w12: D6.2@2755.6,1105 2755.6,1176 3085,1505.4 R23.1@3085,1593.47
NetD11_1: D11.1 K1.8 Q1.3 | length 805.4
  Component Side w12: K1.8@1350,3680 1350,3739.06 1379.5,3739.06 1383,3735.56 1383,3363 1370,3350 ; D11.1@1370,3330 1370,3350 ; v1(1387.5,3351) 1370,3350 ; Q1.3@1575.71,3291.5 v1(1611,3291.5)
  Signal Layer 2 w15: v1(1387.5,3351) 1447,3291.5 v1(1611,3291.5)
NetJ2_2: J2.2 U11.23 | length 385.2
  Component Side w12: U11.23@2855.84,2012.91 2855.84,2062.84 v1(2856,2063) ; v1(3102.3,2043.7) J2.2@3183.03,2043.7
  Signal Layer 2 w15: v1(2856,2063) 3083,2063 v1(3102.3,2043.7)
NetJ3_1: J3.1 U16.1 | length 218.4
  Component Side w12: J3.1@1491.65,1355.98 v1(1491.65,1414) ; v1(1599.84,1424) 1599.84,1402.71 1617,1385.55 U16.1@1619.45,1385.55
  Signal Layer 2 w15: v1(1491.65,1414) 1501.65,1424 v1(1599.84,1424)
NetJTAG/SWD_5: JTAG/SWD.5 U16.3 | length 4213.3
  Component Side w7: v1(1577,1313.5) 1578.53,1315.03 1578.53,1317.63 1607.09,1346.18 U16.3@1619.45,1346.18
  Component Side w10: v1(2699,2530) 2699,2714.74 2833,2848.74 v1(2833,2967) ; v1(2771,3291) 2771.52,3291 2807.52,3255 JTAG/SWD.5@2849.06,3255
  Signal Layer 2 w10: v1(1577,1313.5) 1559.7,1330.8 1541.45,1330.8 1531.2,1320.55 1531.2,1296.77 1584.47,1243.5 1609.83,1243.5 1714.33,1139 2446.47,1139 2455.47,1130 2512.57,1130 2530.07,1112.5 2825,1112.5 2875.5,1163 2875.5,1199.75 3032.14,1356.39 3032.14,1463.7 3001.3,1494.54 2973.54,1494.54 2938,1459 2914.5,1459 2805.5,1568 2805.5,1626.6 2820.85,1641.96 v1(2820.85,1644.5) ; v1(2699,2530) 2703.32,2525.68 2703.32,2087.38 v1(2747,2043.7)
  Solder Side w10: v1(2747,2043.7) 2758.62,2043.7 2830.07,1972.25 2830.07,1816.94 2820.85,1807.73 v1(2820.85,1644.5) ; v1(2771,3291) 2771,3265.75 2774.5,3262.25 2774.5,3025.5 v1(2833,2967)
NetPTC1_1: PTC1.1 TVS1.2 Z1.2 | length 234.7
  Component Side w12: Z1.2@1065,2340 1065,2382 1075,2392 TVS1.2@1075,2435 1116,2435 1153.5,2472.5 PTC1.1@1195,2472.5
NetR4_2: R4.2 R5.1 U4.6 | length 146.7
  Component Side w12: U4.6@3039.49,3690 R5.1@3125.95,3690 3125.95,3659.47 3125.47,3659 R4.2@3125.47,3630
NetR6_1: R6.1 R7.1 U4.7 | length 150.1
  Component Side w12: U4.7@3039.49,3740 3115.47,3740 R6.1@3125.47,3750 R7.1@3125.47,3810
NetR15_1: R15.1 TVS2.2 | length 267.1
  Component Side w12: TVS2.2@1065,3610 1066,3609 v1(1102,3609) ; v1(1161.93,3760) 1161.93,3723.55 R15.1@1162.47,3723
  Signal Layer 1 w15: v1(1102,3609) 1095.5,3615.5 1095.5,3718.28 1112.36,3735.14 1145.14,3735.14 1162,3752
NetR16_1: R16.1 U11.10 | length 81.5
  Component Side w12: R16.1@2499.53,2517.79 U11.10@2581.04,2517.79
NetR18_2: R18.2 U12.1 | length 95.9
  Component Side w12: R18.2@2560,3270.97 2585,3245.97 U12.1@2585,3185.47
NetR20_2: R20.2 U12.3 | length 87.6
  Component Side w12: R20.2@2480,3270.97 2480,3254.81 2485,3249.81 U12.3@2485,3185.47
NetR21_1: R21.1 U2.6 | length 77.3
  Component Side w12: R21.1@1435,1834.53 1473,1834.53 1473.47,1835 U2.6@1512.13,1835
NetR25_1: R25.1 TVS3.2 | length 79.5
  Component Side w12: R25.1@2447.55,3531.85 2475,3559.3 TVS3.2@2475,3600
NetR29_2: R29.2 USB1.2 | length 80
  Component Side w12: USB1.2@2959.49,4042 2959.49,4009.06 2970.55,3998 R29.2@2970.55,3966.58
NetR30_2: R30.2 USB1.3 | length 82.6
  Component Side w12: R30.2@2910.55,3966.58 2927.99,3984.02 USB1.3@2927.99,4042
NetSD1_1: SD1.1 U6.E2 | length 852.2
  Component Side w12: v1(1940.5,1549.5) 1955,1535 1980.13,1535 SD1.1@1980.13,1534.87
  Component Side w15: v1(1909,2191) 1928.15,2171.85 U6.E2@1928.15,2171.22
  Signal Layer 1 w15: v1(1909,2191) 1868.9,2191 1808,2130.1 1808,2109.91 1797.31,2099.22 1797.31,2037.19 1792,2031.88 1792,1813.54 1798,1807.54 1798,1704.6 1872,1630.6 1872,1611.6 1934.1,1549.5 v1(1940.5,1549.5)
NetSD1_2: SD1.2 U6.E3 | length 1097.4
  Component Side w12: v1(1947.52,2191) 1947.74,2191 U6.E3@1967.52,2171.22 ; SD1.2@2023.43,1534.87 2023.43,1612.5 2035.93,1625 2095.5,1625 2153.35,1682.85 v1(2153.35,1854)
  Signal Layer 1 w15: v1(1947.52,2191) 1968,2170.52 1968,2006.97 1968.66,2006.31 1968.66,1980.66 1901,1913 1901,1883.28 1889,1871.28 1889,1853.72 1910.56,1832.16 2131.51,1832.16 v1(2153.35,1854)
NetSD1_3: SD1.3 U6.E4 | length 740.4
  Component Side w12: v1(1987,2191.11) U6.E4@2006.89,2171.22 ; SD1.3@2066.74,1534.87 2066.74,1543.53 2079.43,1556.21 2079.43,1559.43 v1(2080,1560)
  Solder Side w12: v1(1987,2191.11) 2084.5,2093.61 2084.5,1846.96 2070,1832.46 2070,1585.81 2079.43,1576.39 2079.43,1560.57 v1(2080,1560)
NetSD1_5: SD1.5 U6.D1 | length 1222.8
  Component Side w12: v1(1816.5,2207.28) 1817.31,2207.28 1820.62,2210.59 U6.D1@1888.78,2210.59 ; v1(1909,1457.11) 2088.01,1457.11 2153.35,1522.46 SD1.5@2153.35,1534.87
  Signal Layer 1 w15: v1(1816.5,2207.28) 1816.5,2190.92 1771,2145.42 1771,2125.23 1760.31,2114.54 1760.31,2052.52 1755,2047.21 1755,1869.36 1735,1849.36 1735,1739.32 1852,1622.32 1852,1603.32 1877,1578.32 1877,1473.29 1893.17,1457.11 v1(1909,1457.11)
NetSD1_7: SD1.7 U6.D2 | length 1534.1
  Component Side w12: v1(1908.46,2230.28) U6.D2@1928.15,2210.59 ; SD1.7@2239.97,1534.87 2239.97,1526.2 2256.53,1509.64 2256.53,1503.69 2264.34,1495.88 v1(2328.85,1495.88)
  Signal Layer 1 w12: v1(1857,1537.72) 1857,1564.44 1833.5,1587.94 1833.5,1614.66 1700,1748.16 1700,1918.16 1723.91,1942.07 1723.91,2055.54 1741.81,2073.44 1741.81,2122.21 1752.5,2132.89 1752.5,2161.26 1773.53,2182.28 1773.53,2190.47 1813.33,2230.28 v1(1908.46,2230.28)
  Solder Side w12: v1(1857,1537.72) 1926.12,1537.72 1942.34,1521.5 2309.75,1521.5 2318.24,1513.01 2318.24,1507.31 2328.85,1496.69 v1(2328.85,1495.88)
NetSD1_8: SD1.8 U6.D3 | length 1337.2
  Component Side w12: v1(1947.83,2230.28) U6.D3@1967.52,2210.59 ; v1(2257.29,1610.34) 2257.29,1585.26 2283.28,1559.28 SD1.8@2283.28,1534.87
  Signal Layer 2 w12: v1(1921,1590.89) 1921.57,1591.46 1926.3,1591.46 1934.34,1599.5 2130.16,1599.5 2141,1610.34 2141,1619.22 2148.32,1626.54 2180.56,1626.6 2240.21,1626.6 2256.48,1610.34 v1(2257.29,1610.34)
  Signal Layer 1 w12: v1(1778,1786.43) 1773.5,1790.93 1773.5,2039.55 1778.81,2044.86 1778.81,2106.88 1789.5,2117.57 1789.5,2137.76 1861.24,2209.5 1927.06,2209.5 v1(1947.83,2230.28)
  Solder Side w12: 1767.47,1787.01 1759.46,1779 1758.53,1779 1751.5,1771.97 1751.5,1727.34 1819.44,1659.4 1852.49,1659.4 v1(1921,1590.89) ; 1767.48,1787 1777.43,1787 v1(1778,1786.43)
NetU3_4: U3.4 U4.3 | length 445.8
  Component Side w15: U4.3@2850.51,3690 v1(2916,3690) ; v1(3169,3924) 3177.09,3915.91 3193.93,3915.91 U3.4@3195.43,3914.41
  Solder Side w15: v1(2916,3690) 2917,3691 2936,3691 v1(3169,3924)
OSC16: U6.M12 Y3.3 | length 163.2
  Component Side w10: Y3.3@2287.16,1778.34 2321.49,1778.34 2335.67,1792.52 2335.67,1879.72 2321.85,1893.54 U6.M12@2321.85,1895.63
Program: SW1.1 SW1.2 U16.10 | length 1146.6
  Component Side w12: v1(1277,1869) 1305,1837 ; SW1.1@1305,1774.02 1305,1837 ; SW1.2@1305,1900 1305,1837 ; U16.10@1741.5,1346.18 v1(1796,1346.18)
  Solder Side w12: v1(1277,1869) 1354,1792 1354,1471 1474,1351 1791.18,1351 v1(1796,1346.18)
PTA0: JTAG/SWD.4 U6.J5 U16.8 | length 4917.8
  Component Side w12: v1(1736,1259.25) 1710,1285.25 U16.8@1710,1295 1800.5,1295 1875.5,1370 1875.5,1545.38 1838.76,1582.11 1838.76,1816.68 1856.61,1834.53 1962.5,1834.53 v1(1980.13,1852.16) ; v1(2027,1994.48) U6.J5@2046.26,2013.74 ; v1(2519,2786) 2616,2883 2616,3187.5 2633.5,3205 JTAG/SWD.4@2690,3205
  Signal Layer 2 w15: v1(1308,2546) 1477,2715 1612,2715 1730,2833 1850,2833 1952,2731 2464,2731 v1(2519,2786) ; v1(1980.13,1852.16) 1968,1864.28 1968,1922.28 1980.72,1935 2006,1935 2007,1936 2007,1974.48 v1(2027,1994.48)
  Signal Layer 1 w15: v1(1308,2546) 1308,1664.61 1332,1640.61 1332,1438 1437,1333 1437,1124 1491,1070 1632,1070 1726,1164 1726,1249.25 v1(1736,1259.25)
PTA1: JTAG/SWD.8 U6.J6 U16.6 | length 5705.6
  Component Side w12: v1(1662.5,1240.03) 1662.5,1240.24 1670.63,1248.37 U16.6@1670.63,1295 ; v1(2066,1994.11) U6.J6@2085.63,2013.74 ; v1(2623,3305) JTAG/SWD.8@2690,3305
  Signal Layer 1 w15: v1(2066,1994.11) 2181.89,1994.11 v1(2182,1994)
  Solder Side w12: v1@1662.5,1240.13 1656,1233.63 1656,1195.92 1675.92,1176 1772.46,1176 1814.96,1218.5 1911.5,1218.5 2058,1072 2787.5,1072 2803.09,1087.41 3050,1331.5 3050,1595 2952,1693 2952,1885 3046,1979 3046,2710 2623,3133 v1(2623,3305) ; v1(2182,1994) 2195.52,1994 2217.02,1972.5 2230.66,1972.5 2241.5,1961.66 2241.5,1948.02 2294.52,1895 2356.39,1895 2429.39,1968 2595.08,1968 2602.58,1975.5 2773.66,1975.5 2785,1964.16 2785,1675.19 2802.35,1657.84 2802.35,1621.81 2803,1621.16 2803,1087.5
PTA2: JTAG/SWD.6 U6.K6 U16.9 | length 4012.7
  Component Side w12: U16.9@1741.5,1326.5 1750.39,1317.6 v1(1773.5,1317.6) ; v1(2066,1953.63) 2066,1954.74 U6.K6@2085.63,1974.37 ; JTAG/SWD.6@2690,3255 v1(2757,3255)
  Signal Layer 2 w10: 2215.84,1976.35 2216.09,1976.61 2279.94,1976.61 2283.33,1980 ; 2283.6,1971.72 2284.88,2090.03 2282.48,2092.48 2360,2093
  Signal Layer 2 w15: v1(2066,1953.63) 2087.05,1974.68 2152.97,1974.68 2161.54,1966.11 2206.57,1966.11 2215.14,1974.68 ; 2360,2093 2598,1855 v1(2656,1855)
  Signal Layer 1 w15: v1(1773.5,1317.6) 1773.5,1229.22 1831.13,1171.59 2206.3,1171.59 2402,1367.28 2448,1413.28 2448,1484.5 2430,1502.5 2430,1692.68 2466.32,1729 2612.5,1729 2724,1840.5 2724,1923 ; v1(2656,1855) 2724,1923 ; v1(2757,3255) 2724,3222 2724,1923
PTA3: JTAG/SWD.2 U6.K7 U16.7 | length 4734.6
  Component Side w12: v1(1400,1570) 1405,1570 1442,1533 1442,1513.88 1460,1495.88 1460,1334.39 1531.89,1262.5 1609.62,1262.5 1646,1226.12 1646,1187.5 1660.5,1173 1709.5,1173 1724,1187.5 1724,1225 v1(1690.31,1258.69) ; v1@1690.31,1264.5 U16.7@1690.31,1295 ; U6.K7@2125,1974.37 v1(2144.69,1954.68) ; JTAG/SWD.2@2690,3155 2745,3155 v1(2757,3143)
  Signal Layer 2 w15: v1(1570,2980) 1588,2998 1753,2998 1812,2939 1868.5,2939 2072.5,3143 v1(2757,3143)
  Signal Layer 1 w12: v1(1901,1484.5) 1907,1490.5 2045.5,1490.5 v1(2160,1605)
  Signal Layer 1 w15: v1(1400,1570) 1400,1750 1388,1762 1388,2798 v1(1570,2980)
  Solder Side w12: v1(1690.31,1258.69) 1710.4,1258.69 1728.34,1240.75 1743.66,1240.75 1854.71,1351.8 1854.71,1438.21 v1(1901,1484.5) ; v1(2144.69,1954.68) 2144.69,1871.49 2134.85,1861.66 2134.85,1770.81 2104,1739.96 2104,1610.34 2114.84,1599.5 2144.5,1599.5 2149.43,1604.43 2159.43,1604.43 v1(2160,1605)
RAW: D3.1 J1.8 R20.1 TVS3.1 | length 1898.4
  Component Side w12: D3.1@1565,3059 v1(1610,3059) ; v1(2437.5,3700) TVS3.1@2475,3700 ; R20.1@2480,3330.03 v1(2480,3358.27)
  Signal Layer 2 w15: v1(1610,3059) 1610,3251 1724,3365 2473.27,3365 v1(2480,3358.27)
  Signal Layer 1 w15: v1(2437.5,3700) 2480,3657.5 v1(2480,3358.27)
  Solder Side w12: J1.8@2172.6,3824.09 2296.69,3700 v1(2437.5,3700)
RESET_B: JTAG/SWD.10 R34.2 U6.L12 U16.4 U16.13 | length 3191.7
  Component Side w12: v1(1600,1281) 1600,1306.5 1620,1326.5 U16.4@1619.45,1326.5 ; U16.13@1710,1417.05 1710,1481.29 1741.21,1512.5 1741.21,1515.95 ; v1(1750.57,1475) 1750.57,1506.58 1741.21,1515.95 ; v1(1768.95,1546.95) R34.2@1741.21,1546.95 1741.21,1515.95 ; U6.L12@2321.85,1935 2370.23,1935 v1(2375.6,1940.37) ; v1(2588,3355) JTAG/SWD.10@2690,3355
  Signal Layer 2 w15: v1(1600,1281) 1600,1294.51 1750.57,1445.08 v1(1750.57,1475) ; v1(1768.95,1546.95) 1866.5,1644.5 2373,1645.5 2375.6,1648.1 v1(2375.6,1940.37)
  Signal Layer 1 w15: v1(2560,2023) 2562.08,2025.08 2562.08,3046.92 v1(2560,3049)
  Solder Side w12: v1(2375.6,1940.37) 2420.23,1985 2527.66,1985 2542.46,1999.79 2542.46,2004.64 2560,2022.19 v1(2560,2023) ; v1(2560,3049) 2588,3077 v1(2588,3355)
"Safe 12V": C1.2 C3.1 C10.1 PTC1.2 U1.1 U2.5 U7.7 | length 2602.3
  Component Side w12: PTC1.2@1355,2472.5 1388,2472.5 1400.95,2485.45 C10.1@1435,2485.45 ; v1(1435,2525) C10.1@1435,2485.45 ; C1.2@1495,2486.6 1493.85,2485.45 C10.1@1435,2485.45 ; U2.5@1512.13,1885 1533,1885 1533,2188 U1.1@1620,2275 ; v1(1620,2674) U7.7@1620,2729.49 ; v1(1926,3520) C3.1@2013.15,3520
  Signal Layer 1 w15: v1(1435,2525) 1435,2460 1575,2320 ; U1.1@1620,2275 1575,2320 ; v1(1620,2674) 1575,2629 1575,2320
  Solder Side w12: v1(1620,2674) 1638.75,2692.75 1638.75,2895.6 1730.93,2987.78 1754.78,2987.78 1798,3031 1929,3031 2004,3106 2004,3442 v1(1926,3520)
SWCAN: J1.9 R21.2 U2.7 | length 3807.6
  Component Side w12: v1(1410.51,1804.99) 1410.51,1799.96 R21.2@1435,1775.47 1468,1775.47 1477.53,1785 U2.7@1512.13,1785
  Signal Layer 1 w15: v1(1410.51,1804.99) 1420,1795.5 1420,1550.07 1419,1549.07 1365.43,1549.07 1352,1562.5 1352,1706 1348,1710 1348,3662 1275,3735 1275,3962 1127,4110 1127,4220 1135,4228 1414.5,4228 1430,4212.5 1430,3969.65 J1.9@1463.74,3935.91
"USB D_N": R29.1 U6.H2 | length 4647.1
  Component Side w15: v1(1906.93,2032.6) 1908.37,2032.6 1928.15,2052.37 U6.H2@1928.15,2053.11 ; v1(2894,3837) 2905.57,3837 2970.55,3901.98 R29.1@2970.55,3907.53
  Signal Layer 2 w15: v1(1253.5,3942.5) 1316,4005 2180.46,4005 2240.46,3945 2332.22,3945 2394.21,4006.99 2509.37,4006.99 2529.37,3986.99 2697.01,3986.99 2847,3837 v1(2894,3837) ; v1(1661.79,1924.61) 1677.8,1924.61 1685.6,1932.4 1712.12,1932.4 1712.72,1933 1729.28,1933 1729.88,1932.4 1736.12,1932.4 1783.72,1980 1888.4,1980 1906.93,1998.53 v1(1906.93,2032.6)
  Solder Side w15: v1(1253.5,3942.5) 1261.86,3950.86 1274.29,3950.86 1335,3890.14 1335,3406 1299.91,3370.91 1281.27,3370.91 1227,3316.64 1227,3126.64 1474,2879.64 1474,2693.28 1474.5,2692.78 1474.5,2316.37 1474,2315.87 1474,1946.45 1497.43,1923.02 1660.2,1923.02 v1(1661.79,1924.61)
"USB D_P": R30.1 U6.H1 | length 4566.1
  Component Side w15: v1(1851.5,2010.77) 1851.5,2015.83 U6.H1@1888.78,2053.11 ; v1(2894,3862) 2902.79,3870.79 2904,3870.79 2904,3900.98 R30.1@2910.55,3907.53
  Signal Layer 2 w15: v1(1235.82,3960.18) 1305.64,4030 2190.82,4030 2250.82,3970 2321.87,3970 2383.86,4031.99 2519.73,4031.99 2539.73,4011.99 2707.37,4011.99 2857.36,3862 v1(2894,3862) ; v1(1662.5,1953.39) 1666.51,1957.4 1725.76,1957.4 1773.36,2005 1845.73,2005 v1(1851.5,2010.77)
  Solder Side w15: v1(1235.82,3960.18) 1251.5,3975.86 1284.64,3975.86 1360,3900.5 1360,3395.64 1310.26,3345.91 1291.62,3345.91 1252,3306.28 1252,3137 1499,2890 1499,2675.53 ; 1499.5,2680.03 1499.5,2306.01 1499,2305.51 1499,1956.81 1507.15,1948.65 v1@1661.82,1948.65
VBat: C22.2 D7.2 D8.2 U6.L6 U11.20 | length 3980.8
  Component Side w12: D7.2@1455,3265 1480,3265 ; v1(1480,3345) 1480,3265 ; D8.2@1510,3265 1480,3265 ; U6.L6@2085.63,1935 2086,1935 v1(2105,1954) ; v1(2520,2003.5) 2520,1995 C22.2@2499.52,1974.53 2558,1974.53 2596.39,2012.91 U11.20@2655.84,2012.91 2664.5,2021.57 2664.5,2278.96 2689.34,2303.81 2689.34,2331.56 2680.5,2340.4 2680.5,2727.5 v1(2761,2808)
  Signal Layer 2 w15: v1(1480,3345) 1520,3385 2505.27,3385 2718.27,3172 2762.5,3172 2777,3157.5 2777,3125 2763.5,3111.5 2651.5,3111.5 2445,2905 2445,2837 2474,2808 v1(2761,2808) ; v1(2105,1954) 2130,1929 2166,1929 2179.11,1915.89 v1(2183,1915.89)
  Signal Layer 1 w15: v1(2183,1915.89) 2188.68,1915.89 2232.57,1872 2388.5,1872 v1(2520,2003.5)
VDDA: L1.1 R31.1 U6.H5 | length 1300.2
  Component Side w12: R31.1@1205,1534.47 v1(1205,1563) ; v1(2028.33,2035.18) U6.H5@2046.26,2053.11 ; L1.1@1706.71,2041.71 1706.71,2017 L1.1@1706.71,2041.71 ; L1.1@1706.71,2041.71 L1.1@1707,2042 ; L1.1@1706.71,2041.71 L1.1@1707,2042 ; L1.1@1707,2042 L1.1@1710.47,2045.47 L1.1@1707,2042
  Signal Layer 2 w15: v1(1205,1563) 1205,1666 1298,1759 1597.78,1759 1640.5,1801.72 1640.5,1959.68 1700.82,2020 v1(1705.41,2020) 1710,2020 1740.93,2050.93 1894.33,2050.93 1896,2052.6 2010.91,2052.6 v1(2028.33,2035.18)
XTAL32: U6.M7 X1.1 | length 165.1
  Component Side w10: X1.1@2102.24,1740 2125,1762.76 U6.M7@2125,1895.63
pads on no net: JTAG/SWD.7 LP1. LP2. LP3. LP4. P3.2 P3.3 P3.6 SW20. SW21. U3.1 U6.A6 U6.A7 U6.A10 U6.B3 U6.B5 U6.B6 U6.B10 U6.C5 U6.C6 U6.C10 U6.D5 U6.D6 U6.E1 U6.F2 U6.F3 U6.F4 U6.F9 U6.F10 U6.F11 U6.F12 U6.G2 U6.G3 U6.H4 U6.J1 U6.J2 U6.J3 U6.J4 U6.J7 U6.J8 U6.J10 U6.J12 U6.K1 U6.K3 U6.K8 U6.K12 U6.L1 U6.L2 U6.L5 U6.L7 U6.L8 U6.L9 U6.M1 U6.M2 U6.M5 U6.M9 U7.8 U11.1 U11.2 U11.3 U11.5 U11.6 U11.7 U11.8 U11.21 U11.25 U11.26 U11.27 U15.1 U15.2 U15.3 U15.7 U16.5 U16.11 U16.12 U16.14 U16.15 U16.16 USB1.0 USB1.5

## Polygon pours and split planes (outlines as drawn)
GND on Solder Side "GND_L04_P006" (solid, pour order 6): 1000,1000 1000,1691.5 1130,1691.5 ccw(c1130,1822.5) 1130,1953.5 1000,1953.5 1000,3300.5 1130,3300.5 ccw(c1130,3431.5) 1130,3562.5 1000,3562.5 1000,4254 3229,4254 3229,3562.5 3099,3562.5 ccw(c3099,3431.5) 3099,3300.5 3229,3300.5 3229,1953.5 3099,1953.5 ccw(c3099,1822.5) 3099,1691.5 3229,1691.5 3229,1000
GND on Component Side "GND_L01_P005" (solid, pour order 5): 1000,1000 1000,1691.5 1130,1691.5 ccw(c1130,1822.5) 1130,1953.5 1000,1953.5 1000,3300.5 1130,3300.5 ccw(c1130,3431.5) 1130,3562.5 1000,3562.5 1000,4254 3229,4254 3229,3562.5 3099,3562.5 ccw(c3099,3431.5) 3099,3300.5 3229,3300.5 3229,1953.5 3099,1953.5 ccw(c3099,1822.5) 3099,1691.5 3229,1691.5 3229,1000

## Keep-outs
Keep-Out Layer:
  the board outline again, w10

## Other copper
Component Side:
  rectangle net 3V3: 2940,3050 3220,3290
Signal Layer 2:
  rectangle net GND: 2495,1270 2891,1445
  rectangle net GND: 2070,1822.5 2139.9,1915
  rectangle net GND: 1865,1662.09 2360,1835
  rectangle net GND: 2265,1680 2360,1912
Solder Side:
  rectangle net GND: 2487.22,1285.88 2569.4,1452.23
  rectangle net 3V3: 3057,2270 3220.53,3119
  rectangle net GND: 2715,2120 3035,2590
  rectangle net 3V3: 2790,3050 3220.53,3555

## Silkscreen, mask and mechanical layers (free items; w line width, h text height)
Top Overlay:
  text "TX" at 1885.9,2768.12 h25
Bottom Overlay:
  text "SDA" at 1191,4122 h30 r90
  text "SCL" at 1270,4122 h30 r90
  text "J1708-" at 2020,4122 h25 r90
  text "J1708+" at 2131,4122 h25 r90
  text "Gnd" at 1079.94,4119 h30 r90
  text "SWCAN" at 1480,4101.17 h25 r90
  text "CAN0L" at 1805,4101.17 h25 r90
  text "CAN0H" at 1915,4101.17 h25 r90
  text "CAN1L" at 1586,4097.01 h25 r90
  text "A7" at 1691.79,4034.53 h30 r90
  text "15" at 2218,3921 h30
  text "9" at 1412,3918 h30
  text "8" at 2239,3816 h30
  text "1" at 1357,3812 h30
  text "A6" at 1421.94,3773 h30 r90
  text "LIN" at 1528.21,3773 h30 r90
  text "CAN2H" at 1639.94,3773 h30 r90
  text "CAN2L" at 1746.32,3773 h30 r90
  text "CAN1H" at 1854.47,3773 h30 r90
  text "Gnd" at 1968.94,3773 h30 r90
  text "Gnd" at 2078,3773 h30 r90
  text "Vin" at 2193,3773 h30 r90
  text "NMFTA CAN Logger  / Revision 3b, December 2019 / J. Daily, Colo. State Univ. / Fits BUD HP3561 Enclosure" at 1376,3053 h40 r90
Mechanical 1:
  text "Dots are anodes / Bars are Cathodes" at 1299.25,845 h40

## Dimensions
2665,1564 to 3229,1000 on Mechanical 1
1000,1000 to 3229,1000 on Mechanical 1
1000,1000 to 1000,4254 on Mechanical 1